# EAGLE board panelized (EAGLE 8.7.1)
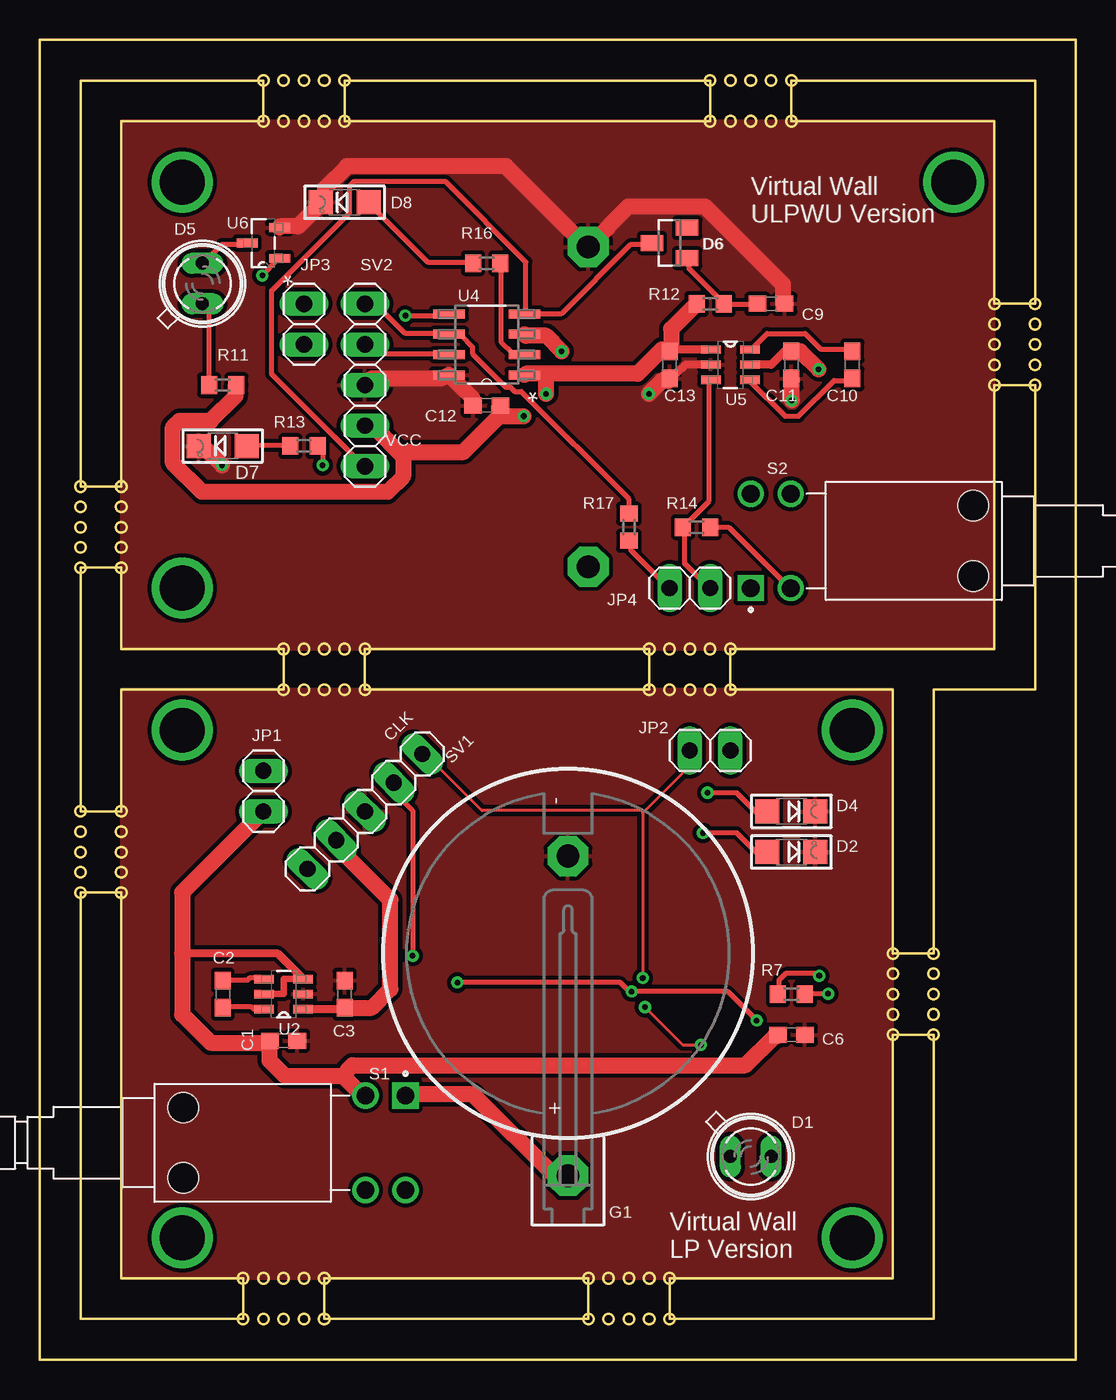
[diagram p0: board, top side]
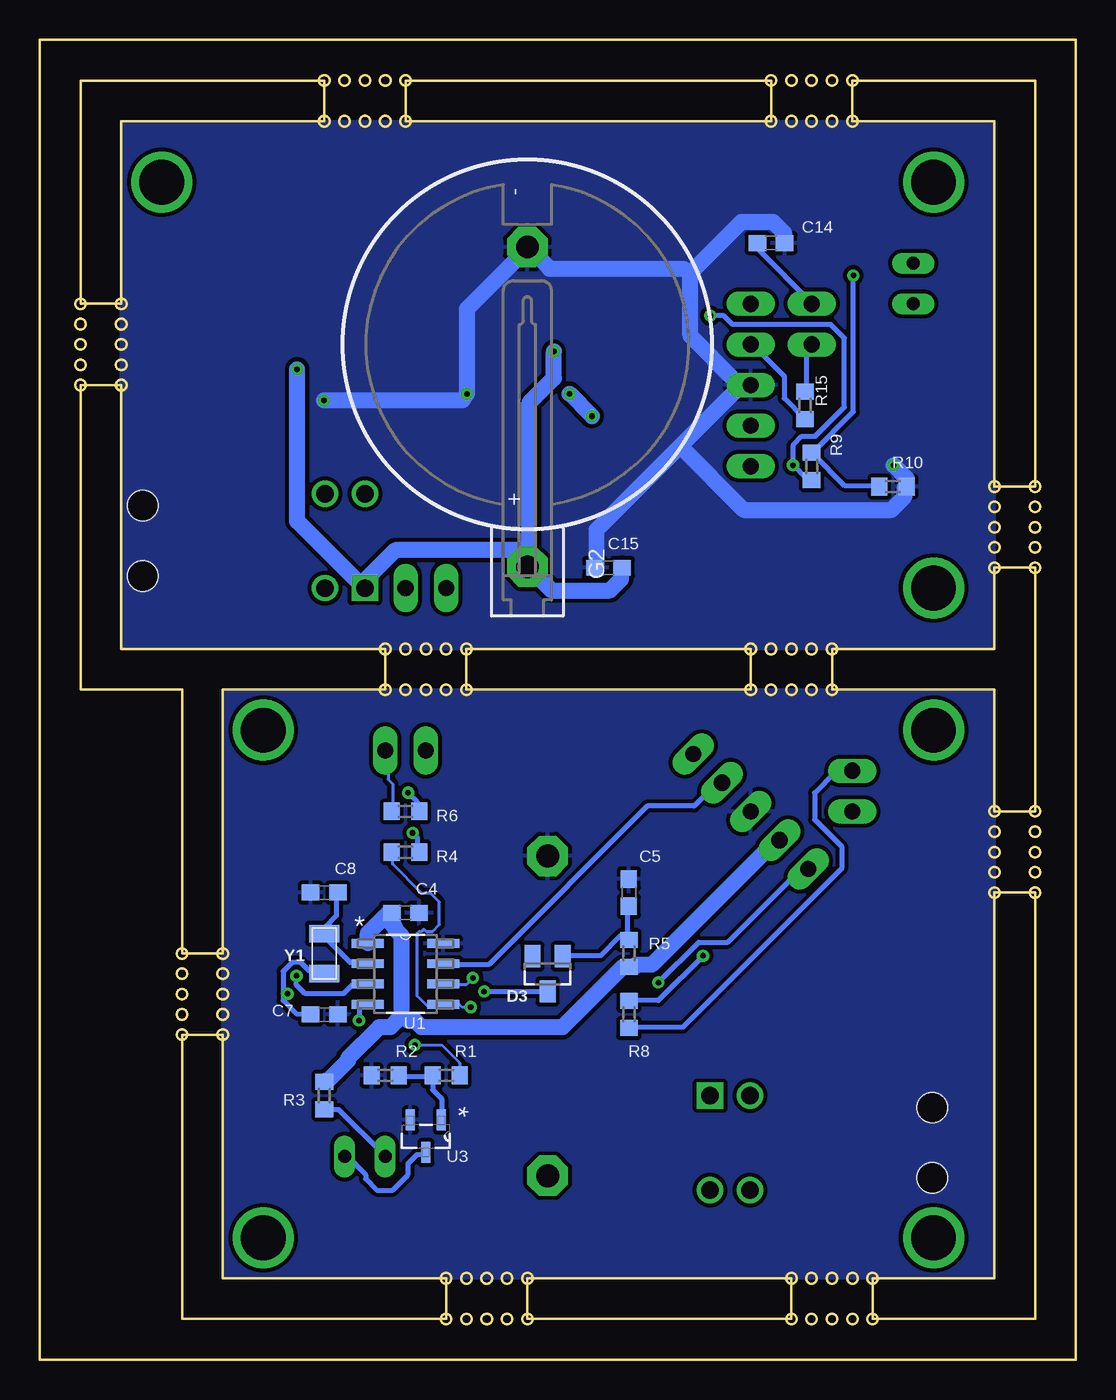
[diagram p1: board, bottom side, seen from below]

Size 64.77 x 82.55 mm. Coordinates in mm from the lower left corner, seen from the top.
Outline: 5.08,41.91 5.08,34.29 2.54,34.29 2.54,49.53 5.08,49.53 5.08,44.45 15.24,44.45 15.24,41.91 5.08,41.91
Outline: 5.08,29.21 5.08,5.08 12.7,5.08 12.7,2.54 2.54,2.54 2.54,29.21 5.08,29.21
Outline: 53.34,5.08 53.34,20.32 55.88,20.32 55.88,2.54 39.37,2.54 39.37,5.08 53.34,5.08
Outline: 53.34,25.4 53.34,41.91 43.18,41.91 43.18,44.45 59.69,44.45 59.69,60.96 62.23,60.96 62.23,41.91 55.88,41.91 55.88,25.4 53.34,25.4
Outline: 5.08,77.47 5.08,54.61 2.54,54.61 2.54,80.01 13.97,80.01 13.97,77.47 5.08,77.47
Outline: 59.69,66.04 59.69,77.47 46.99,77.47 46.99,80.01 62.23,80.01 62.23,66.04 59.69,66.04
Outline: 20.32,44.45 20.32,41.91 38.1,41.91 38.1,44.45 20.32,44.45
Outline: 0,0 0,82.55 64.77,82.55 64.77,0 0,0
Outline: 19.05,77.47 19.05,80.01 41.91,80.01 41.91,77.47 19.05,77.47
Outline: 17.78,5.08 17.78,2.54 34.29,2.54 34.29,5.08 17.78,5.08
Outline: circle at 16.51,44.45 radius 0.32
Outline: circle at 17.78,44.45 radius 0.32
Outline: circle at 19.05,44.45 radius 0.32
Outline: circle at 16.51,41.91 radius 0.32
Outline: circle at 17.78,41.91 radius 0.32
Outline: circle at 19.05,41.91 radius 0.32
Outline: circle at 20.32,41.91 radius 0.32
Outline: circle at 20.32,44.45 radius 0.32
Outline: circle at 38.1,44.45 radius 0.32
Outline: circle at 38.1,41.91 radius 0.32
Outline: circle at 39.37,41.91 radius 0.32
Outline: circle at 40.64,41.91 radius 0.32
Outline: circle at 41.91,41.91 radius 0.32
Outline: circle at 41.91,44.45 radius 0.32
Outline: circle at 40.64,44.45 radius 0.32
Outline: circle at 39.37,44.45 radius 0.32
Outline: circle at 15.24,44.45 radius 0.32
Outline: circle at 15.24,41.91 radius 0.32
Outline: circle at 43.18,41.91 radius 0.32
Outline: circle at 43.18,44.45 radius 0.32
Copper layers (1*16): Top 0.035mm / dielectric 1.5mm / Bottom 0.035mm
Design rules "default *": minimum track width 6mil, minimum drill 0.35mm, track to track 10mil, track to pad 10mil, pad to pad 10mil, via to via 10mil, smd to smd 6mil, copper to edge 0mil, drill to drill 8mil, minimum pad ring 10mil, minimum via ring 8mil, stop-mask expansion 4mil, vias tented up to drill 0mil, thermal gap 10mil
Net classes: 0 default: width 0.305 mm; 1 power: width 1.016 mm, clearance 0.254 mm

## Footprints (pad centres in the part's own frame; a part is rotated, then mirrored left to right if it is on the bottom)
C0603 = smd 1.1 x 1: 1 -0.85,0; 2 0.85,0
SFH482 = drill 0.813 long: A -1.27,0; K 1.27,0
CHIPLED_1206 = smd 1.5 x 1.5: A 0,-1.496; C 0,1.496
SOT23 = smd 1 x 1.4: 1 -0.95,-1.1; 2 0.95,-1.1; 3 0,1.1
1066 = drill 1.422 pad 2.54 octagon: + 13.9,0; - -6.1,0
1X02 = drill 1.016 long: 1 -1.27,0; 2 1.27,0
R0603 = smd 1 x 1.1: 1 -0.85,0; 2 0.85,0
SW_PB400EEQX = drill 1.1 square: 1 0,0 | drill 1.1: 2 0,-2.5; 3 5.9,0; 4 5.9,-2.5 | hole 1.9: 0.75,-13.9; 5.15,-13.9
1X05 = drill 1.016 long: 1 -5.08,0; 2 -2.54,0; 3 0,0; 4 2.54,0; 5 5.08,0
SOIC127P600X175-8N = smd 1.981 x 0.559: 1 -2.362,1.905; 2 -2.362,0.635; 3 -2.362,-0.635; 4 -2.362,-1.905; 5 2.362,-1.905; 6 2.362,-0.635; 7 2.362,0.635; 8 2.362,1.905
SOT95P280X100-6N = smd 1.219 x 0.508: 1 -1.219,0.94; 2 -1.219,0; 3 -1.219,-0.94; 4 1.219,-0.94; 5 1.219,0; 6 1.219,0.94
SOT95P240X110-3N = smd 1.321 x 0.559: 1 -1.016,0.965; 2 -1.016,-0.965; 3 1.016,0
ABS07 = smd 1.1 x 1.9: 1 -1.25,0; 2 1.25,0

## Placement (x,y rotation side)
C1  1u  [C0603]  15.24,19.94 0 top
C2  1u  [C0603]  11.43,22.86 270 top
C3  1u  [C0603]  19.05,22.86 90 top
C4  0.1u  [C0603]  41.91,27.94 0 bottom
C5  0.1u  [C0603]  27.94,29.21 90 bottom
C6  0.1u  [C0603]  46.99,20.32 0 top
C7  12p  [C0603]  46.99,21.59 180 bottom
C8  12p  [C0603]  46.99,29.21 0 bottom
C9  0.1u  [C0603]  45.72,66.04 0 top
C10  1u  [C0603]  50.8,62.23 90 top
C11  1u  [C0603]  46.99,62.23 270 top
C12  0.1u  [C0603]  27.94,59.69 180 top
C13  1u  [C0603]  39.37,62.23 270 top
C14  50n  [C0603]  19.05,69.85 0 bottom
C15  0.1u  [C0603]  29.21,49.53 180 bottom
D1  SFH482  [SFH482]  44.45,12.7 0 top
D2  [CHIPLED_1206]  46.99,31.75 270 top
D3  BAT54  [SOT23]  33.02,24.13 180 bottom
D4  [CHIPLED_1206]  46.99,34.29 270 top
D5  SFH482  [SFH482]  10.16,67.31 90 top
D6  BAT54  [SOT23]  39.37,69.85 90 top
D7  [CHIPLED_1206]  11.43,57.15 90 top
D8  [CHIPLED_1206]  19.05,72.39 90 top
G1  1066  [1066]  33.02,25.4 270 top
G2  1066  [1066]  34.29,63.5 270 bottom
JP1  [1X02]  13.97,35.56 270 top
JP2  [1X02]  41.91,38.1 0 top
JP3  [1X02]  16.51,64.77 90 top
JP4  [1X02]  40.64,48.26 0 top
R1  510  [R0603]  39.37,17.78 180 bottom
R2  10K  [R0603]  43.18,17.78 0 bottom
R3  51  [R0603]  46.99,16.51 90 bottom
R4  330  [R0603]  41.91,31.75 0 bottom
R5  10K  [R0603]  27.94,25.4 270 bottom
R6  330  [R0603]  41.91,34.29 0 bottom
R7  100  [R0603]  46.99,22.86 0 top
R8  1K  [R0603]  27.94,21.59 90 bottom
R9  510  [R0603]  16.51,55.88 90 bottom
R10  10K  [R0603]  11.43,54.61 180 bottom
R11  51  [R0603]  11.43,60.96 0 top
R12  10K  [R0603]  41.91,66.04 180 top
R13  330  [R0603]  16.51,57.15 180 top
R14  1K  [R0603]  41.06,52.07 0 top
R15  220  [R0603]  16.93,59.69 270 bottom
R16  330  [R0603]  27.94,68.58 180 top
R17  10K  [R0603]  36.83,52.07 90 top
S1  PB400EEQX  [SW_PB400EEQX]  22.86,16.51 270 top
S2  PB400EEQX  [SW_PB400EEQX]  44.45,48.26 90 top
SV1  [1X05]  20.32,34.29 45 top
SV2  [1X05]  20.32,60.96 90 top
U1  PIC12F683-I/SN  [SOIC127P600X175-8N]  41.91,24.13 0 bottom
U2  CAT3200TDI-GT3  [SOT95P280X100-6N]  15.24,22.86 180 top
U3  BSS138-7-F  [SOT95P240X110-3N]  40.64,13.97 270 bottom
U4  PIC12F683-I/SN  [SOIC127P600X175-8N]  27.94,63.5 180 top
U5  CAT3200TDI-GT3  [SOT95P280X100-6N]  43.18,62.23 0 top
U6  BSS138-7-F  [SOT95P240X110-3N]  13.97,69.85 180 top
Y1  CRYSTAL.ABS07  [ABS07]  46.99,25.4 90 bottom

## Library data of the parts
C1-C15 = resistor
D1 D5 = led
D2 D4 D7 D8 = microbuilder
D3 D6 = NXP_60_26022015
G1 G2 = 1066; AVAILABILITY: Good; DESCRIPTION: Coin Cell Holder; 20 mm; 0.896 in.; Glass Filled Nylon; Tin Plate; 1; MF: Greenlee Communications; MP: 1066; PACKAGE: None; PRICE: 1.25 USD
JP1-JP4 SV1 SV2 = pinhead
R1-R17 = rcl; SPICEPREFIX: R
S1 S2 = PB400EEQX; AVAILABILITY: Warning; DESCRIPTION: Right Angle Pushbutton Switch; MF: E-Switch; MP: PB400EEQX; PACKAGE: None; PRICE: 0.96 USD
U1 U4 = Microchip_By_element14_Batch_1; MPN: PIC12F683-I/SN; OC_FARNELL: 9759042; OC_NEWARK: 61K3434; PACKAGE: SOIC-8; SUPPLIER: MICROCHIP
U2 U5 = CAT3200TDI-GT3; AVAILABILITY: Good; DESCRIPTION: Regulated Charge Pump, Low Noise, DC-DC Converter; MF: ON Semiconductor; MP: CAT3200TDI-GT3; PACKAGE: TSOT-23-6 ON Semiconductor; PRICE: 0.79 USD
U3 U6 = diodes_inc; MPN: BSS138-7-F; OC_FARNELL: 1843693; OC_NEWARK: 12T1442; PACKAGE: SOT-23-3; SUPPLIER: DIODES INC.
Y1 = abracon-cmonr

## Nets
/SHDN: JP4.2 R14.1 U5.3
CCP1 [led]: R1.1 R4.1 U1.5
CCP2: R9.1 R13.1 U4.5
GND [power]: C1.2 C3.2 C4.2 C5.2 C6.2 C7.1 C8.1 D2.C D4.C G1.- R2.1 SV1.3 U1.8 U2.2 U3.2
GND1 [power]: C9.2 C11.2 C12.2 C13.2 C14.2 C15.2 D7.C D8.C G2.- R10.1 SV2.3 U4.8 U5.2 U6.2
GP5: R16.1 U4.2
ICSPCLK [led]: JP2.1 SV1.5 U1.6
ICSPCLK1: R17.2 SV2.5 U4.6
ICSPDAT: R8.2 SV1.4 U1.7
ICSPDAT1: R15.2 SV2.4 U4.7
MCLR: D3.3 SV1.1 U1.4
MCLR1: D6.3 SV2.1 U4.4
N$1: C2.1 U2.4
N$3: R1.2 R2.2 U3.1
N$4: C2.2 U2.6
N$5: D2.A R4.2
N$6: D1.A R3.1
N$7: D1.K U3.3
N$8: C5.1 D3.1 R5.1
N$9: C7.2 R7.2 Y1.1
N$11: D4.A R6.2
N$13 [led]: JP2.2 R6.1
N$14: JP1.1 R8.1
N$16: R9.2 R10.2 U6.1
N$17: D5.A R11.1
N$18: D5.K U6.3
N$19: C9.1 D6.1 R12.1
N$20: C10.2 U5.6
N$21: C10.1 U5.4
N$22: D7.A R13.2
N$23: R14.2 S2.2
N$24: D8.A R16.2
N$25: C14.1 JP3.2
N$26: JP4.1 R17.1
N$27: JP3.1 R15.1
OSC1: C8.2 U1.2 Y1.2
OSC2: R7.1 U1.3
VBAT [power]: G1.+ S1.1
VBAT1 [power]: C11.1 C15.1 G2.+ S2.1 U4.3 U5.5
VBAT_1 [power]: C1.1 C6.1 JP1.2 S1.2 U2.3 U2.5
VDD [power]: C3.1 C4.1 R3.2 R5.2 SV1.2 U1.1 U2.1
VDD1 [power]: C12.1 C13.1 R11.2 R12.2 SV2.2 U4.1 U5.1

## Tracks (layer width: path | path; a pad name or v marks a point on that pad's centre or on a via)
/SHDN
  Top 0.305: JP4.2 41.85,48.26 40.31,49.8 40.31,52.03 R14.1 40.31,52.17 41.85,53.71 41.85,61.25 U5.3
CCP1  (via drill 0.35)
  Top 0.203: v41.33,19.67 40.21,19.67 v37.83,22.05
  Bottom 0.203: v41.33,19.67 39.65,19.67 38.53,18.55 38.53,17.86 R1.1 | v37.83,22.05 38.39,22.05 38.53,22.19 39.51,22.19 U1.5 39.65,22.19 39.79,22.05 40.49,22.05 41.19,22.75 41.19,26.66 41.05,26.8 40.91,26.8 40.77,26.94 40.63,26.8 40.21,26.8 39.79,27.22 39.79,28.61 40.35,29.17 40.91,29.17 42.72,30.99 42.72,31.69 R4.1
CCP2  (via drill 0.35)
  Top 0.305: v17.68,55.94 17.68,56.78 17.4,57.06 R13.1 | v22.85,65.3 25.5,65.3 U4.5
  Bottom 0.305: R9.1 16.56,55.1 16.84,55.1 v17.68,55.94 17.68,57.2 17.12,57.76 16.28,57.76 14.46,59.58 14.46,63.91 15.3,64.75 21.45,64.75 22.01,65.3 v22.85,65.3
GND
  pour Bottom: 5.08,41.91 5.08,5.08 53.34,5.08 53.34,41.91
  pour Top: 5.08,41.91 5.08,5.08 53.34,5.08 53.34,41.91
GND1  (via drill 0.35)
  Top 0.508: U5.2 40.36,62.23 40.1,61.97 40.05,61.97 39.33,61.25
  Top 1.016: C12.2 27.04,59.71 27.04,60.13 U4.8 25.08,61.39 20.75,61.39 SV2.3 | v11.39,55.94 10.27,57.06 9.99,57.06 D7.C | U6.2 15.02,70.89 16.14,70.89 17.54,72.29 D8.C 17.82,72.85 17.82,73.27 19.21,74.66 29.13,74.66 33.88,69.91 G2.- 34.3,69.63 36.82,72.15 41.57,72.15 46.46,67.26 46.46,66.14 C9.2 | v38.08,60.41 38.91,61.25 39.33,61.25 C13.2 | v47.02,59.99 47.02,61.25 C11.2
  Bottom 1.016: 24.73,57.13 21.03,60.83 20.33,60.83 SV2.3 21.31,61.25 24.11,64.05 24.11,67.96 | 24.73,57.13 29.97,51.89 29.97,49.66 C15.2 | 24.73,57.13 20.75,53.15 11.53,53.15 10.69,53.99 10.69,54.55 R10.1 10.55,55.1 v11.39,55.94 | 24.11,67.96 20.89,71.17 18.94,71.17 18.24,70.47 18.24,69.91 C14.2 | v47.02,59.99 38.35,59.99 v38.08,60.41 38.08,65.72 34.3,69.49 G2.- 33.88,69.22 32.91,68.24 24.52,68.24 24.11,67.96
  pour Top: 5.08,77.47 5.08,44.45 59.69,44.45 59.69,77.47
  pour Bottom: 5.08,77.47 5.08,44.45 59.69,44.45 59.69,77.47
GP5
  Top 0.305: R16.1 28.85,68.52 28.85,63.63 29.55,62.93 30.25,62.93 U4.2
ICSPCLK  (via drill 0.35)
  Top 0.203: v37.69,23.86 37.69,34.2 37.76,34.27 | 37.76,34.27 40.63,37.13 40.63,37.97 JP2.1 | SV1.5 24,37.83 24.84,36.99 24.98,36.99 27.63,34.34 37.69,34.34 37.76,34.27
  Bottom 0.203: v37.69,23.86 38.11,23.44 39.51,23.44 U1.6
ICSPCLK1
  Top 0.305: R17.2 36.82,53.01 36.82,53.85 30.11,60.55 29.69,60.55 29.41,60.83 29.13,60.83 27.04,62.93 27.04,63.35 26.34,64.05 25.64,64.05 U4.6 25.5,64.19 22.85,64.19 21.03,66 20.33,66 SV2.5
ICSPDAT  (via drill 0.35)
  Top 0.305: v23.3,25.26 23.3,34.34 22.19,35.46 22.19,36.02 SV1.4
  Bottom 0.305: v23.3,25.26 26.1,22.47 27.91,22.47 R8.2 | U1.7 39.51,24.7 36.72,24.7 26.8,34.62 23.86,34.62 22.47,36.02 22.19,36.02 SV1.4
ICSPDAT1
  Top 0.305: SV2.4 20.89,62.93 25.5,62.93 U4.7
  Bottom 0.305: R15.2 16.98,58.88 18.24,60.13 18.24,61.53 20.19,63.49 SV2.4
MCLR  (via drill 0.35)
  Top 0.305: v44.82,21.21 43,23.02 v37,23.02 36.86,23.02 36.3,23.58 v26.1,23.58
  Bottom 0.305: v37,23.02 33.08,23.02 D3.3 | v44.82,21.21 44.82,22.05 44.68,22.19 44.4,22.19 U1.4 | v26.1,23.58 23.58,26.1 21.77,26.1 17.3,30.57 16.74,30.57 SV1.1
MCLR1
  Top 0.305: D6.3 38.21,69.77 36.96,69.77 32.63,65.44 30.39,65.44 U4.4 30.39,65.58 30.39,68.66 25.36,73.69 19.63,73.69 19.36,73.41 19.36,71.73 14.46,66.84 14.46,61.67 20.19,55.94 SV2.1
N$1
  Top 0.305: C2.1 11.43,23.72 12.97,23.72 13.11,23.86 13.95,23.86 U2.4
N$2  (via drill 2.8)
  other vias: 8.89,39.37
N$3
  Bottom 0.305: R2.2 42.3,17.72 40.35,17.72 R1.2 40.21,17.72 40.21,16.88 39.65,16.32 39.65,15.06 U3.1
N$4
  Top 0.305: C2.2 11.43,22.05 13.25,22.05 13.39,21.91 13.95,21.91 U2.6
N$5  (via drill 0.35)
  Top 0.305: v41.47,32.94 43.56,32.94 44.82,31.69 45.38,31.69 D2.A
  Bottom 0.305: v41.47,32.94 41.19,32.66 41.19,31.83 R4.2
N$6
  Bottom 0.305: R3.1 46.91,15.62 46.08,15.62 43.28,12.83 D1.A
N$7
  Bottom 0.305: U3.3 40.77,12.83 41.19,12.83 41.75,12.27 41.75,11.57 42.72,10.59 43.7,10.59 44.4,11.29 44.4,11.57 45.66,12.83 D1.K
N$8
  Bottom 0.305: C5.1 28.05,28.33 28.05,26.38 R5.1 28.19,26.52 28.47,26.52 29.73,25.26 31.97,25.26 D3.1
N$9  (via drill 0.35)
  Top 0.305: v49.29,22.88 47.89,22.88 R7.2
  Bottom 0.305: 49.57,22.88 49.57,24.28 49.01,24.84 48.45,24.84 47.89,24.28 47.05,24.28 Y1.1 | 49.57,22.88 49.57,22.47 48.73,21.63 47.89,21.63 C7.2 | v49.29,22.88 49.57,22.88
N$10  (via drill 2.8)
  other vias: 8.89,7.62
N$11  (via drill 0.35)
  Top 0.305: v41.75,35.46 43.56,35.46 44.82,34.2 45.38,34.2 D4.A
  Bottom 0.305: v41.75,35.46 41.19,34.9 41.19,34.34 R6.2
N$12  (via drill 2.8)
  other vias: 50.8,39.37
N$13
  Bottom 0.203: R6.1 42.72,34.34 42.72,36.02 43,36.3 43,37.83 43.14,37.97 JP2.2
N$14
  Bottom 0.305: R8.1 27.91,20.79 24.56,20.79 14.64,30.71 14.64,32.11 16.32,33.78 16.32,35.46 15.06,36.72 14.08,36.72 JP1.1
N$15  (via drill 2.8)
  other vias: 50.8,7.62
N$16  (via drill 0.35)
  Top 0.305: v13.91,67.82 14.88,68.8 U6.1
  Bottom 0.305: R10.2 12.37,54.69 14.46,54.69 16.42,56.64 R9.2 16.42,56.78 13.91,59.3 v13.91,67.82
N$17
  Top 0.305: R11.1 10.55,60.97 10.55,65.72 10.27,66 D5.A
N$18
  Top 0.305: U6.3 12.93,69.77 11.39,69.77 10.27,68.66 D5.K
N$19
  Top 0.305: C9.1 44.78,66 42.82,66 R12.1 42.69,66.14 40.59,68.24 40.59,68.8 D6.1
N$20
  Top 0.305: C10.2 50.79,63.21 48.83,63.21 47.85,64.19 45.48,64.19 44.5,63.21 U5.6
N$21
  Top 0.305: C10.1 50.79,61.25 49.67,61.25 47.43,59.02 46.6,59.02 44.36,61.25 U5.4
N$22
  Top 0.305: R13.2 15.58,57.2 12.93,57.2 D7.A
N$23
  Top 0.305: R14.2 41.99,52.03 43.1,52.03 46.88,48.26 S2.2
N$24
  Top 0.305: R16.2 27.04,68.66 24.24,68.66 20.61,72.29 D8.A
N$25
  Bottom 0.305: C14.1 19.77,69.77 19.77,69.36 16.56,66.14 JP3.2
N$26
  Top 0.305: R17.1 36.96,51.19 36.96,50.63 39.33,48.26 JP4.1
N$27
  Bottom 0.305: R15.1 16.84,60.55 16.84,63.21 16.56,63.49 JP3.1
N$28  (via drill 2.8)
  other vias: 8.89,73.66
N$29  (via drill 2.8)
  other vias: 57.15,73.66
N$30  (via drill 2.8)
  other vias: 8.89,48.26
OSC1
  Bottom 0.305: C8.2 46.22,29.17 46.22,27.77 46.91,27.08 46.91,26.66 Y1.2 47.05,26.52 45.38,24.84 44.4,24.84 U1.2
OSC2  (via drill 0.35)
  Top 0.305: v48.73,24 48.59,24.14 46.63,24.14 46.22,23.72 46.22,22.88 R7.1
  Bottom 0.305: v48.73,24 48.73,23.44 48.17,22.88 45.8,22.88 45.24,23.44 44.4,23.44 U1.3
VBAT
  Top 1.016: S1.1 22.88,16.6 27.08,16.6 32.25,11.43 32.94,11.43 G1.+
VBAT1  (via drill 0.35)
  Top 0.508: C11.1 46.57,63.08 45.72,62.23 U5.5
  Top 1.016: v48.69,61.95 47.57,63.07 47.02,63.07 C11.1 | v32.63,63.07 31.65,64.05 30.39,64.05 U4.3
  Bottom 1.016: v48.69,61.95 48.69,52.45 44.5,48.26 S2.1 44.36,48.82 42.55,50.63 34.58,50.63 G2.+ | C15.1 28.43,49.52 28.43,48.82 29.13,48.12 32.77,48.12 34.16,49.52 G2.+ | v32.63,63.07 32.63,61.39 34.16,59.85 34.16,50.08 G2.+
VBAT_1
  Top 0.406: U2.3 15.24,23.8 15.24,22.86 U2.5
  Top 0.508: U2.3 14.86,25.4 8.89,25.4
  Top 1.016: 14.36,19.81 14.36,18.69 15.34,17.72 18.97,17.72 | 18.97,17.72 20.23,16.46 S1.2 | 14.36,19.81 C1.1 | C6.1 46.08,20.23 45.94,20.23 44.12,18.41 19.53,18.41 19.25,18.14 18.97,17.72 | 14.08,34.2 JP1.2 8.89,29.21 8.89,25.4 8.89,21.59 10.67,19.81 14.36,19.81
VDD
  Top 0.508: U2.1 18.96,21.92 C3.1
  Top 1.016: SV1.2 18.55,32.38 18.55,32.11 21.91,28.75 21.91,23.18 20.74,22.01 C3.1
  Bottom 1.016: 43.21,27.7 44.26,26.66 44.26,26.1 U1.1 | 43.21,27.7 43,27.91 42.86,27.91 C4.1 | 42.16,21.49 42.86,20.79 43.56,20.79 45.52,18.83 45.52,18.69 46.77,17.44 46.91,17.44 R3.2 | 42.16,21.49 42.16,26.52 42.58,26.94 42.58,27.08 43.21,27.7 | SV1.2 18.55,32.38 18.83,32.38 26.52,24.7 27.5,24.7 27.63,24.56 27.91,24.56 R5.2 28.33,24.56 32.11,20.79 40.91,20.79 41.33,21.21 41.75,21.21 42.16,21.49
VDD1  (via drill 0.35)
  Top 0.508: U5.1 38.88,63.17 38.02,62.31
  Top 1.016: R12.2 41.01,66 39.47,64.47 39.47,63.21 C13.1 38.91,63.21 38.02,62.31 37.38,61.67 31.65,61.67 | 31.65,61.67 30.39,61.67 U4.1 | 22.71,56.5 22.71,55.24 21.73,54.27 10.13,54.27 8.32,56.08 8.32,58.32 8.74,58.74 10.69,58.74 12.23,60.27 12.23,60.83 R11.2 | 22.71,56.5 20.89,58.32 20.33,58.32 SV2.2 | 28.71,59.02 28.71,59.58 C12.1 | 28.71,59.02 26.48,56.78 23.13,56.78 22.71,56.5 | v31.65,60.41 31.65,61.67 | 28.71,59.02 v30.25,59.02
  Bottom 1.016: v30.25,59.02 v31.65,60.41

## Text on the board
tPlace: VCC
tNames: Virtual Wall / ULPWU Version | CLK | Virtual Wall / LP Version
_tNames: D2 | D1 | U3 | R7 | D4 | JP1 | SV1 | U1 | R4 | C5 | R3 | C3 | C1 | C2 | U2 | R5 | C4 | VCC | D1 | S1 | R8 | R9 | Virtual Wall / ULPWU Design | JP2 | JP1 | JP2 | SV1 | D4 | D2 | C2 | R7 | U2 | C3 | C1 | C6 | S1 | D1 | G1
_bNames: C7 | R6 | R2 | R1 | C6 | G1 | R6 | C5 | R4 | C8 | C4 | R5 | Y1 | D3 | C7 | Virtual Wall / LP Design | U1 | R8 | R1 | R2 | R3 | U3